# EAGLE board TIEVOX Interface HAT (EAGLE 7.4.0)

Size 67.46 x 70 mm. Coordinates in mm from the lower left corner, seen from the top.
Outline: 0,0 67.46,0 67.46,70 0,69.84 0,0
Copper layers (1*16): Top 0.035mm / dielectric 1.5mm / Bottom 0.035mm
Design rules "default": minimum track width 10mil, minimum drill 24mil, track to track 8mil, track to pad 8mil, pad to pad 8mil, via to via 8mil, smd to smd 8mil, copper to edge 40mil, drill to drill 8mil, minimum pad ring 10mil, minimum via ring 8mil, stop-mask expansion 4mil, vias tented up to drill 0mil, thermal gap 10mil
Holes 3.2 mm at 3.5,3.5 61.5,3.5 3.5,52.5 61.5,52.5

## Footprints (pad centres in the part's own frame; a part is rotated, then mirrored left to right if it is on the bottom)
C1005 = smd 0.7 x 0.9: 1 -0.65,0; 2 0.65,0
USBBF-1 = drill 0.889 pad 1.321 square: 1 -1.25,-4.71 | drill 0.889 pad 1.321: 2 1.25,-4.71; 3 1.25,-2.71; 4 -1.25,-2.71 | drill 2.362 pad 3.175: CASE1 -6.02,0; CASE2 6.02,0
E3,5-8 = drill 0.813 pad 1.6: + -1.778,0 | drill 0.813 pad 1.6 octagon: - 1.778,0
1206 = smd 1.6 x 1.8: 1 -1.4,0; 2 1.4,0
1502_01 = drill 0.8 pad 1.2 long: 1 0,2.35; 2 -2.35,0.75; 3 2.35,0.75 | hole 1.2: 0,-2.5
RPI_GPIO_MALE = drill 1.1: 1_3.3VDC -1.27,24.13; 2_5VDC 1.27,24.13; 3_I2C1_SDA -1.27,21.59; 4_5VDC 1.27,21.59; 5_I2C1_SCL -1.27,19.05; 6_GND 1.27,19.05; 7_GPIO4 -1.27,16.51; 8_UART_TXD 1.27,16.51; 9_GND -1.27,13.97; 10_UART_RXD 1.27,13.97; 11_GPIO17 -1.27,11.43; 12_GPIO18 1.27,11.43; 13_GPIO27 -1.27,8.89; 14_GND 1.27,8.89; 15_GPIO22 -1.27,6.35; 16_GPIO23 1.27,6.35; 17_3.3VDC -1.27,3.81; 18_GPIO24 1.27,3.81; 19_SPI0_MOSI -1.27,1.27; 20_GND 1.27,1.27; 21_SPI0_MISO -1.27,-1.27; 22_GPIO25 1.27,-1.27; 23_SPI0_SCLK -1.27,-3.81; 24_SPI0_CE0 1.27,-3.81; 25_GND -1.27,-6.35; 26_SPI0_CE1 1.27,-6.35; 27_ID_SD_EEPROM -1.27,-8.89; 28_ID_SC_EEPROM 1.27,-8.89; 29_GPIO5 -1.27,-11.43; 30_GND 1.27,-11.43; 31_GPIO6 -1.27,-13.97; 32_GPIO12 1.27,-13.97; 33_GPIO13 -1.27,-16.51; 34_GND 1.27,-16.51; 35_GPIO19 -1.27,-19.05; 36_GPIO16 1.27,-19.05; 37_GPIO26 -1.27,-21.59; 38_GPIO20 1.27,-21.59; 39_GND -1.27,-24.13; 40_GPIO21 1.27,-24.13
PWR_HDR_FEMALE_2X7 = drill 0.914 octagon: +3.3VDC1 2.54,1.27; +3.3VDC2 5.08,1.27; +3.3VDC3 7.62,1.27; +5VDC1 -5.08,1.27; +5VDC2 -2.54,1.27; +5VDC3 0,1.27; GND1 -7.62,-1.27; GND2 -5.08,-1.27; GND3 -2.54,-1.27; GND4 0,-1.27; GND5 2.54,-1.27; GND6 5.08,-1.27; GND7 7.62,-1.27 | drill 0.914: +12VDC -7.62,1.27
DMMT5401 = smd 0.406 x 0.813: B1 0,-1.676; B2 0.95,-1.676; C1 -0.95,-1.676; C2 0.95,1.676; E1 -0.95,1.676; E2 0,1.676
NE12S = drill 0.8: ENABLE 6.8,0; GND 3.4,0; TRIM 0,0; VIN 5.08,0; VOUT 1.7,0 | hole 0.8: 1.7,0; 3.4,0; 5.1,0; 6.8,0; 0,0
0207/10 = drill 0.813 pad 1.676 octagon: 1 -5.08,0; 2 5.08,0
R01005 = smd 0.2 x 0.25: 1 -0.163,0; 2 0.163,0
R1005 = smd 0.7 x 0.9: 1 -0.65,0; 2 0.65,0
RTRIM3006P = drill 0.61: 1 -7.62,1.27; 2 0,-1.27; 3 5.08,1.27
2X04 = drill 1.016 octagon: 1 -3.81,-1.27; 2 -3.81,1.27; 3 -1.27,-1.27; 4 -1.27,1.27; 5 1.27,-1.27; 6 1.27,1.27; 7 3.81,-1.27; 8 3.81,1.27
H5R25RA = drill 1.092: 1 16.612,1.422; 2 13.843,1.422; 3 11.074,1.422; 4 8.306,1.422; 5 5.537,1.422; 6 2.769,1.422; 7 0,1.422; 8 -2.769,1.422; 9 -5.537,1.422; 10 -8.306,1.422; 11 -11.074,1.422; 12 -13.843,1.422; 13 -16.612,1.422; 14 15.227,-1.422; 15 12.459,-1.422; 16 9.69,-1.422; 17 6.921,-1.422; 18 4.153,-1.422; 19 1.384,-1.422; 20 -1.384,-1.422; 21 -4.153,-1.422; 22 -6.921,-1.422; 23 -9.69,-1.422; 24 -12.459,-1.422; 25 -15.227,-1.422 | hole 3.048: -23.52,0; 23.52,0
SOT103P240X110-3N = smd 1.321 x 0.559: 1 -1.016,1.016; 2 -1.016,-1.016; 3 1.016,0
UDFN8 = smd 0.32 x 0.6: 1 -0.75,-1.4; 2 -0.25,-1.4; 3 0.25,-1.4; 4 0.75,-1.4; 5 0.75,1.4; 6 0.25,1.4; 7 -0.25,1.4; 8 -0.75,1.4 | smd 1.6 x 0.2: PAD 0,0
GS27159 = drill 1.1: 3.3VDC -2.54,10.16; 5VDC 5.08,10.16; GND -5.08,10.16; RXD 0,10.16; TXD 2.54,10.16; USB_5VDC -3.24,-7.62; USB_D+ 1,-7.62; USB_D- -1,-7.62; USB_GND 3.24,-7.62 | hole 1.1: 1,-7.62; 3.24,-7.62; -1,-7.62; -3.24,-7.62; -5.08,10.16; -2.54,10.16; 0,10.16; 2.54,10.16; 5.08,10.16

## Placement (x,y rotation side)
C1  0.1uF  [C1005]  34.92,20.32 0 top
CONSOLE1  [USBBF-1]  75.56,57.15 270 top  (outside the outline)
CP1  1000uF  [E3,5-8]  20.32,45.09 90 top
F1  PT1206L  [1206]  18.41,39.37 0 top
F2  PT1206L  [1206]  50.8,23.5 270 top
FA1  1502_01  [1502_01]  46.99,53.34 0 top
GPIO1  RPI_GPIOUPPER  [RPI_GPIO_MALE]  32.38,9.53 90 top
HD_PWR_1  PWR_HDR_FEMALE_2X7  [PWR_HDR_FEMALE_2X7]  13.97,22.23 0 top
IC1  DMMT5401  [DMMT5401]  6.99,35.56 0 top
IC2  DMMT5401  [DMMT5401]  58.42,31.11 90 top
IC_PWR_1  6A  [NE12S]  6.35,46.35 0 top
R1  2.2K  [0207/10]  13.34,38.73 90 top
R2  10K,1%  [R01005]  6.03,31.75 90 top
R3  47K,1%  [R01005]  9.84,36.99 90 top
R4  10K,1%  [R01005]  60.33,22.23 0 top
R5  47K,1%  [R01005]  60.33,26.67 0 top
R6  1K  [R1005]  41.91,20.32 0 top
R7  3.9K  [R1005]  41.91,31.75 0 top
R8  3.9K  [R1005]  37.47,25.4 0 top
RA1  1502_01  [1502_01]  46.99,45.72 0 top
RT1  10K  [RTRIM3006P]  12.7,54.61 180 top
SPIO1  2.4GHz  [2X04]  33.02,49.53 180 top
TI  D-SUB25-H5R25RA  [H5R25RA]  34.29,63.5 180 top
U1  DMP2305U-7  [SOT103P240X110-3N]  6.99,41.27 0 top
U2  DMP2305U-7  [SOT103P240X110-3N]  52.07,31.11 180 top
U4  CAT24C32.UDFN8  [UDFN8]  29.21,27.3 0 top
UART1  GS27159  [GS27159]  55.88,28.57 180 top

## Library data of the parts
C1 R1 R6-R8 = adafruit
CONSOLE1 = connector; DESC: USB B socket; SUPPLIER: Jameco: 230958; VALSTAT: label
CP1 R2-R5 = rcl
F1 F2 = microbuilder
FA1 RA1 = con-lumberg; OC_FARNELL: 4739747; OC_NEWARK: unknown
GPIO1 = connectors
HD_PWR_1 = con-lsta
IC1 IC2 = Diodes_Inc_By_element14_Batch_1
IC_PWR_1 UART1 = packages
RT1 = resistor
SPIO1 = pinhead
TI = con-thomas-betts; MPN: H5R25RA29CS; OC_FARNELL: unknown; OC_NEWARK: 93F8340
U1 U2 = Diodes_Inc_By_element14_Batch_1; MPN: DMP2305U-7; OC_FARNELL: 1858668; OC_NEWARK: 23T5607; PACKAGE: SOT-23-3; SUPPLIER: DIODES INC.
U4 = on-semiconductor

## Nets
5VDC: F2.2 UART1.5VDC
+3.3VDC: C1.2 GPIO1.1_3.3VDC GPIO1.17_3.3VDC HD_PWR_1.+3.3VDC1 HD_PWR_1.+3.3VDC2 HD_PWR_1.+3.3VDC3 R6.2 R7.2 R8.2 SPIO1.2 TI.4 U4.8
+5VDC: GPIO1.2_5VDC GPIO1.4_5VDC HD_PWR_1.+5VDC1 HD_PWR_1.+5VDC2 HD_PWR_1.+5VDC3 IC1.E2 IC2.E2 TI.5 U1.2 U2.2
CONSOLE_ON: GPIO1.38_GPIO20 UART1.3.3VDC
GND: C1.1 CONSOLE1.CASE1 CONSOLE1.CASE2 CP1.- GPIO1.6_GND GPIO1.9_GND GPIO1.14_GND GPIO1.20_GND GPIO1.25_GND GPIO1.30_GND GPIO1.34_GND GPIO1.39_GND HD_PWR_1.GND1 HD_PWR_1.GND2 HD_PWR_1.GND3 HD_PWR_1.GND4 HD_PWR_1.GND5 HD_PWR_1.GND6 HD_PWR_1.GND7 IC_PWR_1.GND R1.1 R2.1 R3.1 R4.1 R5.1 R8.1 RT1.3 SPIO1.1 TI.14 U4.1 U4.2 U4.3 U4.4 U4.PAD UART1.GND
N$1: GPIO1.19_SPI0_MOSI SPIO1.6 TI.17
N$2: GPIO1.21_SPI0_MISO SPIO1.7 TI.16
N$3: GPIO1.23_SPI0_SCLK SPIO1.5 TI.15
N$4: GPIO1.26_SPI0_CE1 SPIO1.3
N$5: GPIO1.31_GPIO6 SPIO1.8
N$6: GPIO1.37_GPIO26 SPIO1.4
N$7: GPIO1.7_GPIO4 TI.2
N$8: GPIO1.11_GPIO17 TI.3
N$9: GPIO1.13_GPIO27 TI.7
N$10: GPIO1.24_SPI0_CE0 TI.18
N$11: GPIO1.29_GPIO5 TI.19
N$12: GPIO1.16_GPIO23 TI.20
N$13: GPIO1.15_GPIO22 TI.21
N$14: CONSOLE1.4 UART1.USB_GND
N$15: CONSOLE1.1 UART1.USB_5VDC
N$16: CONSOLE1.2 UART1.USB_D-
N$17: CONSOLE1.3 UART1.USB_D+
N$18: GPIO1.8_UART_TXD UART1.TXD
N$19: GPIO1.10_UART_RXD UART1.RXD
N$20: FA1.1 TI.11
N$21: RA1.1 TI.10
N$22: RA1.3 TI.24
N$23: RA1.2 TI.25
N$24: FA1.3 TI.23
N$25: FA1.2 TI.22
N$26: GPIO1.3_I2C1_SDA TI.12
N$27: GPIO1.5_I2C1_SCL TI.13
N$28: CP1.+ F1.2 IC_PWR_1.VOUT
N$29: IC_PWR_1.ENABLE R1.2
N$30: F1.1 IC1.E1 U1.3
N$31: IC1.B1 IC1.B2 IC1.C1 R2.2
N$32: F2.1 IC2.E1 U2.3
N$33: IC1.C2 R3.2
N$34: IC2.C2 R5.2 U2.1
N$35: IC2.B1 IC2.B2 IC2.C1 R4.2
N$36: U1.1
N$38: GPIO1.27_ID_SD_EEPROM U4.6
N$39: R6.1 U4.7
N$40: GPIO1.28_ID_SC_EEPROM R7.1 U4.5
PWR12_IN: HD_PWR_1.+12VDC IC_PWR_1.VIN TI.1
PWR12_TRIM: IC_PWR_1.TRIM RT1.2

## Tracks (layer width: path | path; a pad name or v marks a point on that pad's centre or on a via)
5VDC  (1 unrouted)
+3.3VDC  (11 unrouted)
+5VDC  (9 unrouted)
CONSOLE_ON  (1 unrouted)
GND  (34 unrouted)
N$1  (2 unrouted)
N$2  (2 unrouted)
N$3  (2 unrouted)
N$4  (1 unrouted)
N$5  (1 unrouted)
N$6  (1 unrouted)
N$7  (1 unrouted)
N$8  (1 unrouted)
N$9  (1 unrouted)
N$10  (1 unrouted)
N$11  (1 unrouted)
N$12  (1 unrouted)
N$13  (1 unrouted)
N$14  (1 unrouted)
N$15  (1 unrouted)
N$16  (1 unrouted)
N$17  (1 unrouted)
N$18  (1 unrouted)
N$19  (1 unrouted)
N$20  (1 unrouted)
N$21  (1 unrouted)
N$22  (1 unrouted)
N$23  (1 unrouted)
N$24  (1 unrouted)
N$25  (1 unrouted)
N$26  (1 unrouted)
N$27  (1 unrouted)
N$28  (2 unrouted)
N$29  (1 unrouted)
N$30  (2 unrouted)
N$31  (3 unrouted)
N$32  (2 unrouted)
N$33  (1 unrouted)
N$34  (2 unrouted)
N$35  (3 unrouted)
N$38  (1 unrouted)
N$39  (1 unrouted)
N$40  (2 unrouted)
PWR12_IN  (2 unrouted)
PWR12_TRIM  (1 unrouted)

## Text on the board
tNames: (c) 2015, Unplugged Software | TIEVOX Interface Board Rev 1.0